# Altium PCB BMW F800GS Board.PcbDoc
Units mm, origin at the board's own origin, x right, y up, seen from the top; angles counter-clockwise.
Board outline 152.4 x 101.6 mm, 2 copper layers (Top Layer, Bottom Layer); 16 components, 17 nets, 62 pads, 4 vias.
Unrouted connection lines stored in the file: 18.
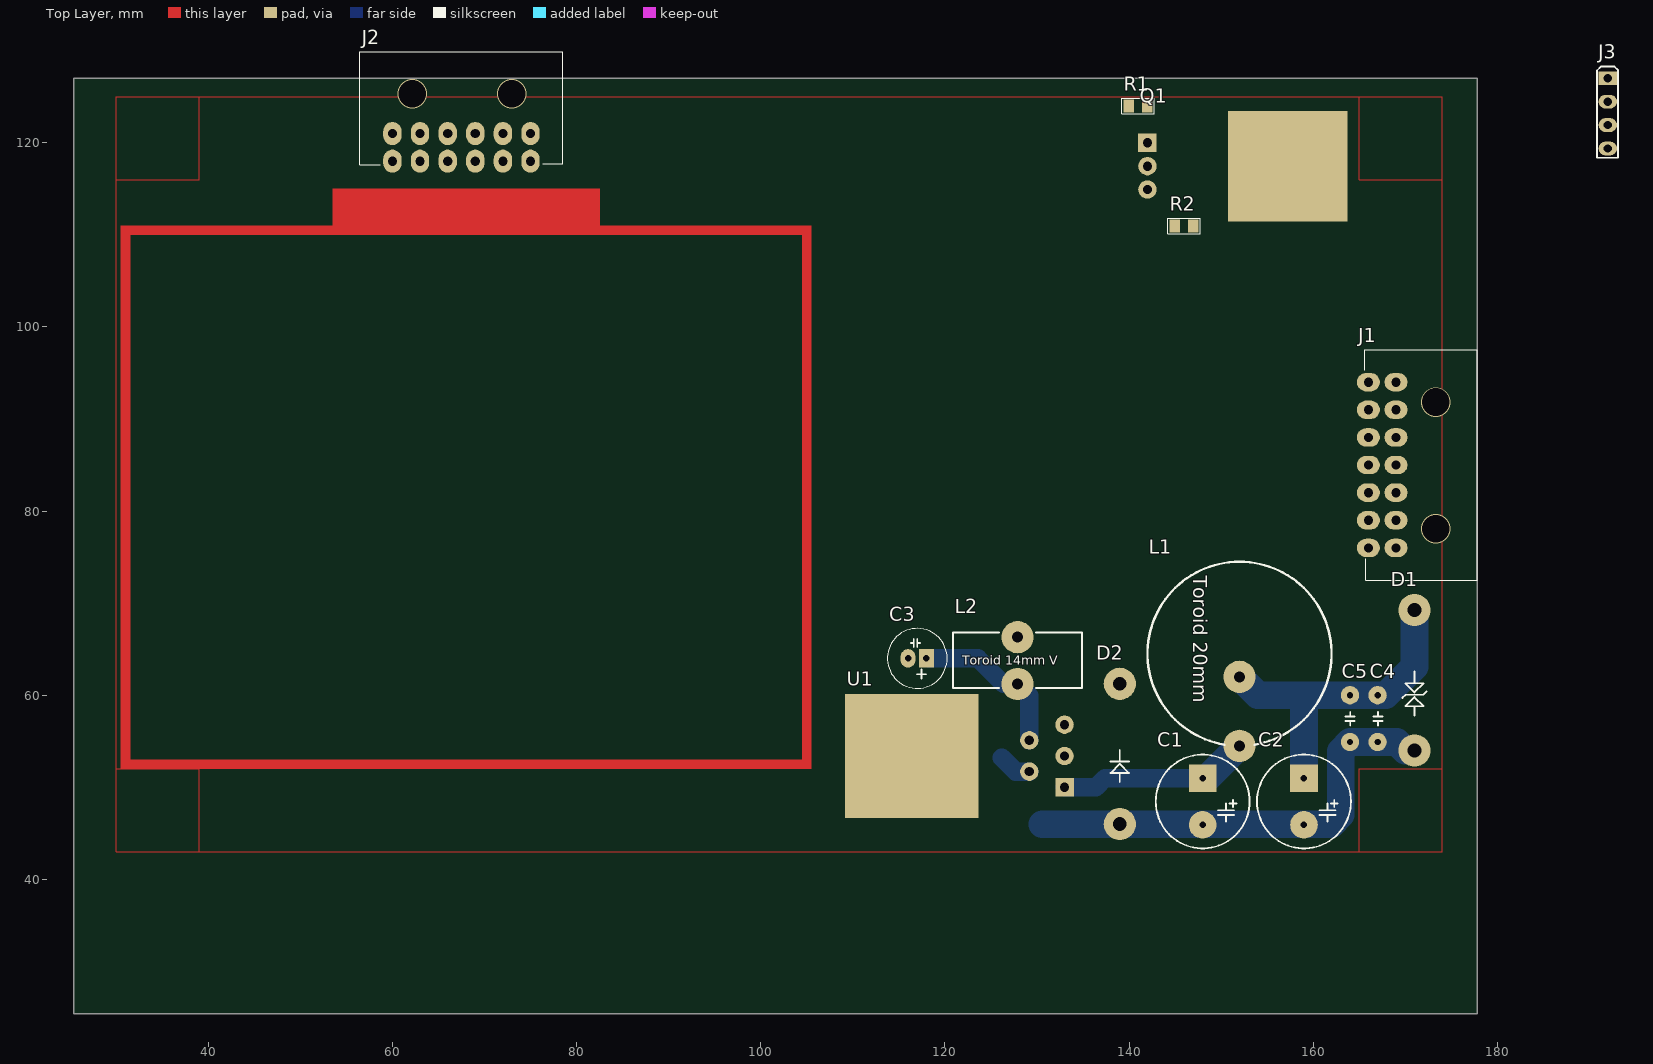
[diagram p0: Top Layer view]
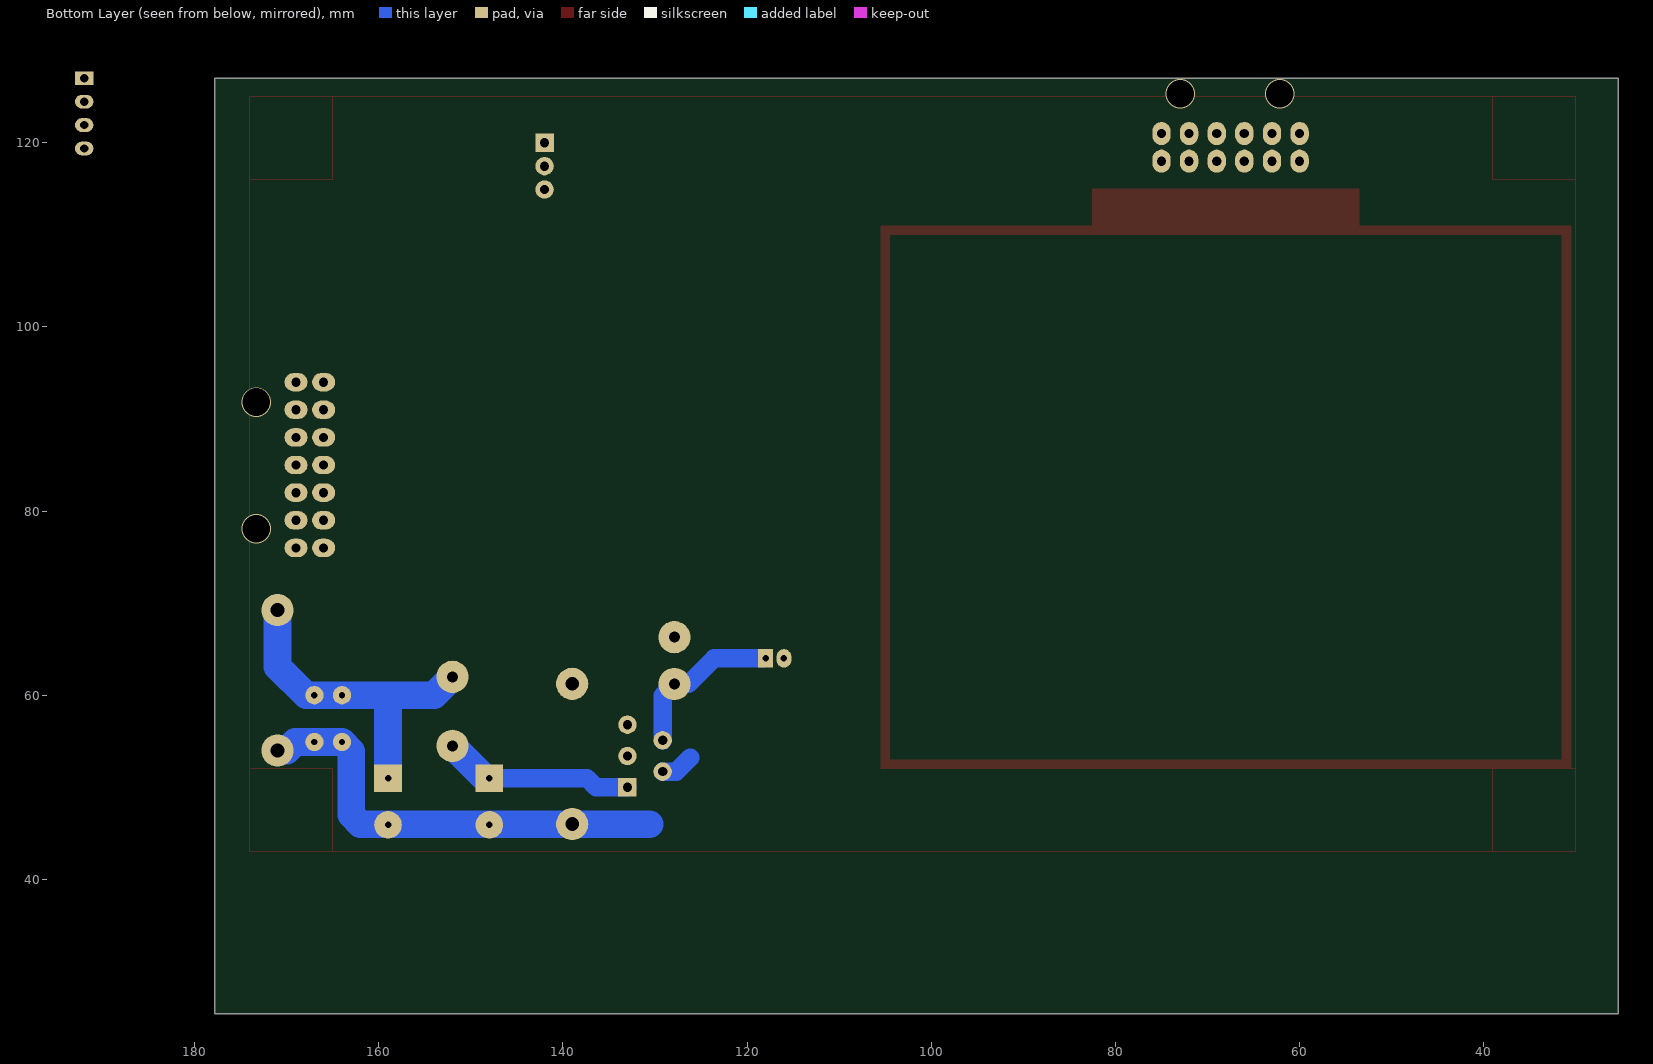
[diagram p1: Bottom Layer view, seen from below]

## Layer stack, top to bottom
Top Solder: solder mask 0.0102, Solder Resist, Dk 3.5
Top Layer: signal copper 0.0356
Dielectric 1: dielectric 0.32, FR-4, Dk 4.8
Bottom Layer: signal copper 0.0356
Bottom Solder: solder mask 0.0102, Solder Resist, Dk 3.5

## Board outline
25.4,25.4 177.8,25.4 177.8,127 25.4,127

## Design rules (kind name [scope] priority, off if disabled: settings)
Clearance [All] p1: gap=0.254
ComponentClearance [All] p1: gap=0 collisioncheckmode=3 verticalgap=0 showdistances=FALSE
PolygonConnect [All] p1: connectstyle=Relief reliefconductorwidth=0.254 reliefentries=4 polygonreliefangle="90 Angle" airgapwidth=0.254
RoutingVias [All] p1: holewidth=0.711 width=1.27 viastyle="Through Hole" minholewidth=0.711 minwidth=1.27 maxholewidth=0.711 maxwidth=1.27
SolderMaskExpansion [All] p1: expansion=0.102
Width [All] p1: maxlimit=3 minlimit=0.5 preferedwidth=1
28 further rules are at their usual default settings.

## Classes and differential pairs
component class "BMW F800GS Board": J1 J2 J3
component class "Power Converter": C1 C2 C3 C4 C5 D1 D2 L1 L2 Q1 R1 R2 U1

## Components (designator, comment, footprint, x,y, rotation, side; value= is the part's Value field where it differs from the comment)
C1 "1000uF" "Cap E p5.08mm D10.2mm (3p)" 148,51 r270 top
C2 "1000uF" "Cap E p5.08mm D10.2mm (3p)" 159,51 r270 top
C3 "220uF 16V" "Cap E p2mm D6.5xH11" 118,64 r180 top
C4 "100n" "Cap P5.08MM (3p) disk2" 167,60 r270 top
C5 "10n" "Cap P5.08MM (3p) disk2" 164,60 r270 top
D1 "1.5KE20CA" "TVS diode DO-201" 171,54 r90 top
D2 "1N5822" "Diode DO-201" 139,46 r90 top
J1 "Output Connector" "Molex Micro-Fit 3.0 - 14 pin D R" 169,94 r90 top
J2 "Alarm System" "Molex Micro-Fit 3.0 - 12 pin D R" 60,121 r180 top
J3 "GPS-GSM Alarm module" "Line 2.54 X 4" 192,127 r0 top
L1 "Inductor" "Toroid 20mm" 152,62 r270 top
L2 "Inductor V" "Toroid V D14-W6" 127.9,66.3 r270 top
Q1 "STP55NF06" "TO220-2 Horisontal" 142,120 r180 top
R1 "10k" "SMD 0805 (2012)" 142,124 r180 top
R2 "1kOm" "SMD 0805 (2012)" 147,111 r180 top
U1 "LM2596T-5.0" "TO220-5 Horisontal" 133,50 r0 top

## Footprints (in the part's own frame and the unit in brackets; to place one, negate y for a bottom-side part, rotate by r counter-clockwise, add the part's x,y. Pads: shape width x height; smd on the part's side, far side on the other; paste and mask are expansions set on the pad)
"Cap E p2mm D6.5xH11" [mm] "D 6.5mm; H 11mm"
  rect 1.6x2 hole 0.7: 1(0,0)
  oval 1.6x2 hole 0.7: 2(2,0)
  silkscreen extent -2.25,-3.25 4.25,3.25, body extent -2.22,-3.22 4.27,3.28, height 11.49
"Cap E p5.08mm D10.2mm (3p)" [mm] "D 10.2mm; H 17.5mm, Hole: 0.7mm"
  rect 3x3 hole 0.7: 1(0,0)
  round 3 hole 0.7: 2(5.08,0)
  silkscreen extent -2.56,-5.1 7.64,5.1, body extent -2.49,-4.97 7.57,5.08, height 16.53
"Cap P5.08MM (3p) disk2" [mm]
  round 2 hole 0.7: 1(0,0) 2(5.08,0)
  silkscreen extent 1.8,-0.48 3.3,0.53, body extent -0.29,-1.12 5.29,1.16, height 6.04
"Diode DO-201" [mm] "p6"
  round 3.5 hole 1.5: A(0,0) K(15.24,0)
  silkscreen extent 4.54,-1 8.04,1, body extent -0.66,-2.8 15.9,2.8, height 7.6
"Line 2.54 X 4" [mm]
  rect 2x1.5 hole 0.9: 1(0,0)
  oval 2x1.5 hole 0.9: 2(0,-2.54) 3(0,-5.08) 4(0,-7.62)
  silkscreen extent -1.17,-8.62 1.12,1.27, body extent -1.25,-8.78 1.25,1.38, height 8.2
"Molex Micro-Fit 3.0 - 12 pin D R" [mm]
  oval 2x2.5 hole 1: 1(0,0) 2(-3,0) 3(-6,0) 4(-9,0) 5(-12,0) 6(-15,0) 7(0,3) 8(-3,3) 9(-6,3) 10(-9,3) 11(-12,3) 12(-15,3)
  silkscreen extent -18.52,-8.87 3.52,3.4, body extent -18.57,-8.94 3.57,3.3, height 8.83
"Molex Micro-Fit 3.0 - 14 pin D R" [mm]
  oval 2x2.5 hole 1: 1(0,0) 2(-3,0) 3(-6,0) 4(-9,0) 5(-12,0) 6(-15,0) 7(-18,0) 8(0,3) 9(-3,3) 10(-6,3) 11(-9,3) 12(-12,3) 13(-15,3) 14(-18,3)
  silkscreen extent -21.5,-8.8 3.5,3.4, body extent -21.57,-8.85 3.58,3.39, height 8.83
"SMD 0805 (2012)" [mil]
  rect 45x55 smd: 1(0.35,0.98) 2(80.35,0.98)
  silkscreen extent -29,-32 109,34, body extent 1,-24 80,26, height 18
"TO220-2 Horisontal" [mm]
  rect 2x2 hole 1: 1(0,0)
  rect 13x12 smd: 2(-15.24,2.54)
  round 2 hole 1: 2(0,2.54) 3(0,5.08)
  body extent -19.7,-2.46 0,7.54, height 4.6
"TO220-5 Horisontal" [mm]
  rect 2x2 hole 1: 1(0,0)
  round 2 hole 1: 2(-3.825,1.7) 3(0,3.4) 4(-3.825,5.1) 5(0,6.8)
  rect 14.5x13.5 smd: 11(-16.575,3.4)
  body extent -21.9,-1.8 0.33,8.6, height 5
"Toroid 20mm" [mm] "16.5mm Green ring TEC.ORG"
  round 3.5 hole 1.2: 1(0,0) 2(7.5,0)
  silkscreen extent -12.5,-10 7.36,10
"Toroid V D14-W6" [mm] "10mm Black ring TEC.ORG"
  round 3.5 hole 1.2: 1(0,0) 2(5.08,0)
  silkscreen extent -0.5,-7 5.5,7
"TVS diode DO-201" [mm] "6p, p15.24mm"
  round 3.5 hole 1.5: 1(0,0) 2(15.24,0)
  silkscreen extent 3.8,-1.3 8.6,1.3, body extent -0.66,-2.8 15.9,2.8, height 7.6

## Part data
C1 C2: library part "Cap E 1000mF x 25V", "Capacitor"
C3: library part "Cap E 220mF x 16V", "Capacitor"
C4 C5: library part "Cap Ceramic", "Capacitor"
D1: library part "TVS 1.5KE20CA", "1500W Transil (TVS Diode)"
D2: library part "D Shotki 1N5822", "3 Amp Shotki  Diode"
J1: library part "Micro-Fit 14 (2x7)", "Horisontal, Dbl line, Male"
J2: library part "Micro-Fit 12 (2x6)", "Horisontal, Dbl line, Male"
J3: library part PLS-4, "Vert, Sgl line, Male"
L2: "Inductor Vertical"
Q1: "N-Channel 60V - 0.018? - 50A - D2PAK - I2PAK"
R1 R2: library part "Res SMD 0805"
U1: "Voltage Regulator"

## Via types
v1: diameter 3.2, hole 3, Top Layer to Bottom Layer, 4 vias

## Nets (pads, with @x,y where several pads share a name; then routed paths per layer and width w, separated by ;. In a path a pad name is that pad's centre, name@x,y a point inside that pad or via, vN(x,y) a via of type N, cw(c..) or ccw(c..) an arc to the next point about the centre after c; other vN are vias at no path point)
+5V: C3.1 J1.4 L2.2 U1.4 | length 17.4
  Bottom Layer w2: C3.1@118.3,64 123.6,64 126.38,61.22 L2.2 129.175,59.945 U1.4
"+12 V RAW": C2.1 C4.1 C5.1 D1.2 L1.1 Q1.3 | length 36.3
  Bottom Layer w3: L1.1 154,60 C5.1 C4.1 167.9,60 171,63.1 D1.2 ; C2.1 159,60
+12V: J1.1 J2.1 Q1.2
"+12V NO NOISE": C1.1 L1.2 U1.1 | length 20.4
  Bottom Layer w2: U1.1 136.4,50 137.4,51 C1.1
  Bottom Layer w3: C1.1@148.5,51 L1.2
ADDRELAY: J2.9
ALARMLED: J2.5
GND: C1.2 C2.2 C3.2 C4.2 C5.2 D1.1 D2.A J1.3 J2.2 R1.2 U1.3 U1.5 U1.11 | length 48.5
  Bottom Layer w3: 130.6,46 D2.A 162,46 163,47 163,53.92 C5.2 C4.2 169.08,54.92 170,54 D1.1
NetD2_K: D2.K L2.1 U1.2 | length 3.6
  Bottom Layer w2: 126.2,53.2 127.7,51.7 U1.2
NetQ1_1: Q1.1 R1.1 R2.2
POWERON: J1.2 J2.6 R2.1
RELAYCENTER: J2.10
RELAYO\F\F\: J2.12
RELAYO\N\: J2.11
"SENSOR HARDWARE": J2.3
"SENSOR MW": J2.4
SIREN: J2.7
TURNS: J2.8
pads on no net: J1.5 J1.6 J1.7 J1.8 J1.9 J1.10 J1.11 J1.12 J1.13 J1.14 J3.1 J3.2 J3.3 J3.4
copper on no net: | length 524
  Top Layer w0.1: 30,52 39,52 39,43 ; 30,116 39,116 39,125 ; 165,43 165,52 174,52 ; 165,125 165,116 174,116 ; 30,43 174,43 174,125 30,125 30,43
  other v1: 173.32,78.07 173.32,91.84 62.16,125.32 72.95,125.325

## Other copper
Top Layer:
  region: 30.5,111 53.5,111 53.5,115 82.5,115 82.5,111 105.5,111 105.5,52 104.5,52 104.5,110 31.5,110 31.5,53 104.5,53 104.5,52 30.5,52

## Text inside footprints (layer, text, board x,y; h text height)
L1: Top Overlay "Toroid 20mm" at 147,73 h1.52 r270
L2: Top Overlay "Toroid 14mm V" at 121.9,63.3 h1